# EAGLE board swarm (EAGLE 9.1.3)
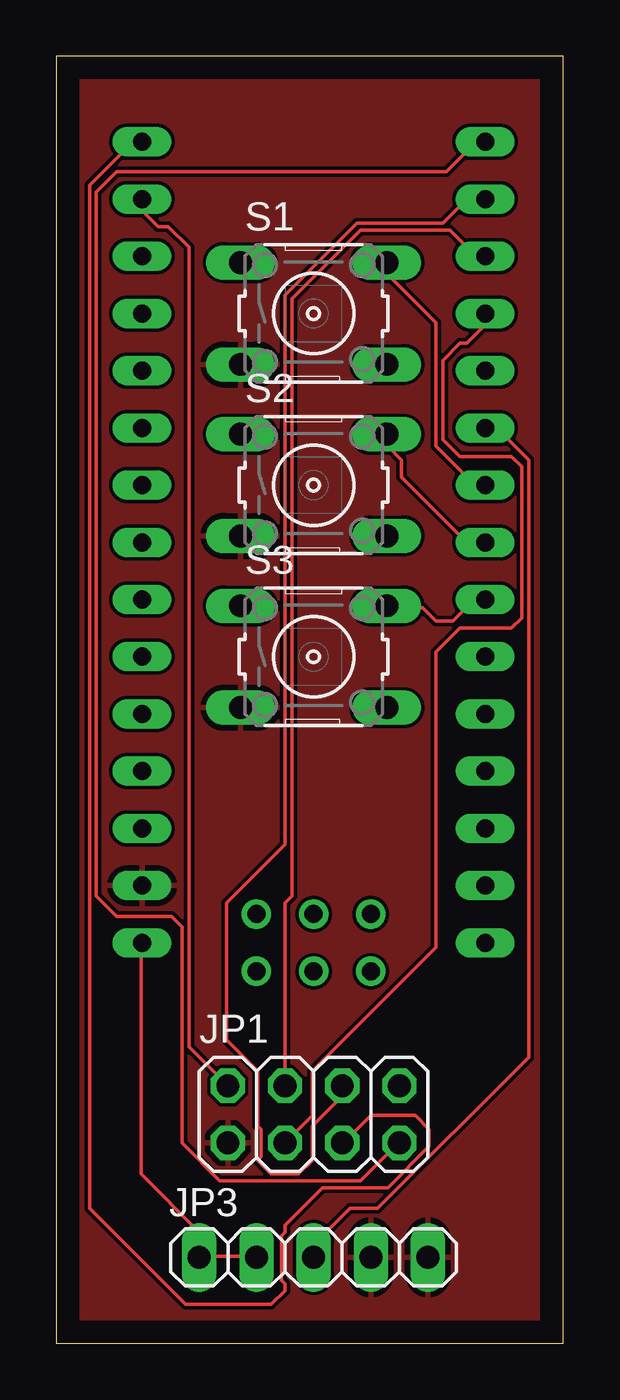
[diagram p0: board, top side]

Size 22.53 x 57.14 mm. Coordinates in mm from the lower left corner, seen from the top.
Outline: 0,0 22.53,0 22.53,57.14 0,57.14 0,0
Copper layers (1*16): Top 0.035mm / dielectric 1.5mm / Bottom 0.035mm
Design rules "default": minimum track width 6mil, minimum drill 0.35mm, track to track 6mil, track to pad 6mil, pad to pad 6mil, via to via 6mil, smd to smd 6mil, copper to edge 40mil, drill to drill 6mil, minimum pad ring 10mil, minimum via ring 8mil, stop-mask expansion 4mil, vias tented up to drill 0mil, thermal gap 10mil

## Footprints (pad centres in the part's own frame; a part is rotated, then mirrored left to right if it is on the bottom)
2X04 = drill 1.016 octagon: 1 -3.81,-1.27; 2 -3.81,1.27; 3 -1.27,-1.27; 4 -1.27,1.27; 5 1.27,-1.27; 6 1.27,1.27; 7 3.81,-1.27; 8 3.81,1.27
1X05 = drill 1.016 long: 1 -5.08,0; 2 -2.54,0; 3 0,0; 4 2.54,0; 5 5.08,0
B3F-10XX = drill 1.016 long: 1 -3.251,2.261; 2 3.251,2.261; 3 -3.251,-2.261; 4 3.251,-2.261
NANO = drill 0.8 long: 3.3V -10.16,24.13; 5V -10.16,-1.27; A0 -10.16,19.05; A1 -10.16,16.51; A2 -10.16,13.97; A3 -10.16,11.43; A4 -10.16,8.89; A5 -10.16,6.35; A6 -10.16,3.81; A7 -10.16,1.27; AREF -10.16,21.59; D2 5.08,1.27; D3 5.08,3.81; D4 5.08,6.35; D5 5.08,8.89; D6 5.08,11.43; D7 5.08,13.97; D8 5.08,16.51; D9 5.08,19.05; D10 5.08,21.59; D11 5.08,24.13; D12 5.08,26.67; D13 -10.16,26.67; GND -10.16,-6.35; GND1 5.08,-1.27; RAW -10.16,-8.89; RST -10.16,-3.81; RST1 5.08,-3.81; RX1 5.08,-6.35; TX0 5.08,-8.89 | drill 0.8: ICSP1 -5.08,-10.16; ICSP2 -5.08,-7.62; ICSP3 -2.54,-10.16; ICSP4 -2.54,-7.62; ICSP5 0,-10.16; ICSP6 0,-7.62

## Placement (x,y rotation side)
JP1  [2X04]  11.43,10.16 0 top
JP3  [1X05]  11.43,3.81 0 top
S1  [B3F-10XX]  11.43,45.72 0 top
S2  [B3F-10XX]  11.43,38.1 0 top
S3  [B3F-10XX]  11.43,30.48 0 top
U$1  NANO  [NANO]  13.97,26.67 0 top

## Library data of the parts
JP1 JP3 = pinhead
S1-S3 = switch-omron; MPN: B3F-1000; OC_FARNELL: 176432; OC_NEWARK: 36M3542
U$1 = Arduino-clone

## Nets
GND: JP1.1 JP3.4 JP3.5 S1.3 S2.3 S3.3 U$1.GND
N$1: JP3.3 U$1.D7
N$2: JP3.1 JP3.2 U$1.RAW
N$3: S1.2 U$1.D6
N$4: JP1.7 U$1.D12
N$5: JP1.5 U$1.D13
N$6: JP1.3 U$1.D9
N$7: JP1.6 U$1.D11
N$8: JP1.4 U$1.D10
N$9: JP1.2 U$1.3.3V
N$10: S2.2 U$1.D5
N$11: S3.2 U$1.D4

## Tracks (layer width: path | path; a pad name or v marks a point on that pad's centre or on a via)
GND
  pour Top: 0,57.15 22.86,57.15 22.86,0 0,0
N$1
  Top 0.152: U$1.D7 19.15,40.59 19.61,40.59 20.98,39.22 20.98,12.7 14.28,5.99 13.06,5.99 11.53,4.47 11.53,3.86 JP3.3
N$2
  Top 0.152: 6.35,3.86 6.35,4.93 3.76,7.52 3.76,17.73 U$1.RAW | 6.35,3.86 8.79,3.86 JP3.2 | 6.35,3.86 JP3.1
N$3
  Top 0.152: U$1.D6 19,38.15 18.54,38.15 16.87,39.83 16.87,45.31 14.73,47.45 14.73,47.9 S1.2
N$4
  Top 0.152: U$1.D12 19,53.24 18.54,53.24 17.32,52.02 2.69,52.02 1.78,51.1 1.78,19.86 2.69,18.95 5.13,18.95 5.59,18.49 5.59,8.89 7.26,7.21 13.51,7.21 15.19,8.89 JP1.7
N$5
  Top 0.152: U$1.D13 3.76,53.24 3.3,53.24 1.47,51.41 1.47,5.99 5.74,1.73 9.55,1.73 10.16,2.34 10.16,2.64 10.01,2.79 10.01,4.78 10.16,4.93 10.16,5.23 11.84,6.91 14.73,6.91 16.56,8.74 16.56,9.5 15.95,10.11 13.97,10.11 12.75,8.89 JP1.5
N$6
  Top 0.152: JP1.3 11.38,10.11 11.38,12.09 16.87,17.58 16.87,30.68 17.93,31.75 20.22,31.75 20.68,32.21 20.68,38.91 20.22,39.37 17.93,39.37 17.17,40.13 17.17,43.64 17.93,44.4 18.24,44.4 19,45.16 19,45.62 U$1.D9
N$7
  Top 0.152: U$1.D11 18.24,50.8 17.17,49.73 13.36,49.73 10.16,46.53 10.16,22.15 7.57,19.56 7.57,13.46 8.94,12.09 8.94,9.65 9.09,9.5 9.09,8.28 8.94,8.13 9.55,7.52 10.77,7.52 11.38,8.13 11.38,9.65 12.6,10.87 12.6,11.33 JP1.6
N$8
  Top 0.152: JP1.4 10.16,19.56 10.47,19.86 10.47,46.38 13.51,49.43 17.48,49.43 18.54,48.36 19,48.36 U$1.D10
N$9
  Top 0.152: JP1.2 5.89,13.16 5.89,48.67 4.98,49.58 4.52,49.58 3.91,50.19 3.91,50.8 U$1.3.3V
N$10
  Top 0.152: U$1.D5 18.24,35.56 15.34,38.46 15.34,39.22 14.73,39.83 14.73,40.28 S2.2
N$11
  Top 0.152: U$1.D4 19,32.97 18.54,32.97 17.63,32.05 16.87,32.05 16.26,32.66 14.73,32.66 S3.2